# Altium PCB CANFD_SIC_transciever_with_WAKE_and_SLEEP.PcbDoc
Units mil, origin at the board's own origin, x right, y up, seen from the top; angles counter-clockwise.
Board outline 6000 x 4000 mil, 2 copper layers (Top Layer, Bottom Layer); 22 components, 19 nets, 62 pads, 0 vias.
Unrouted connection lines stored in the file: 35.
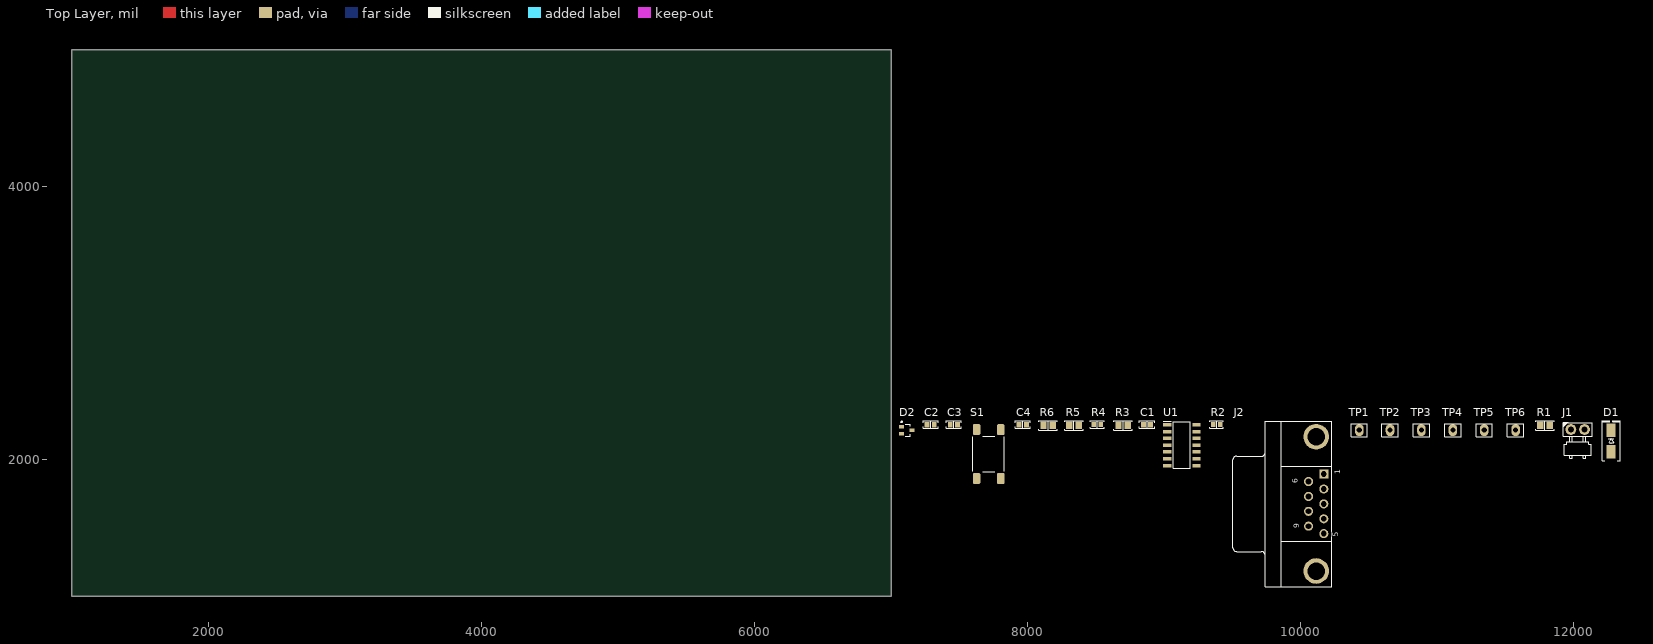
[diagram p0: Top Layer view]
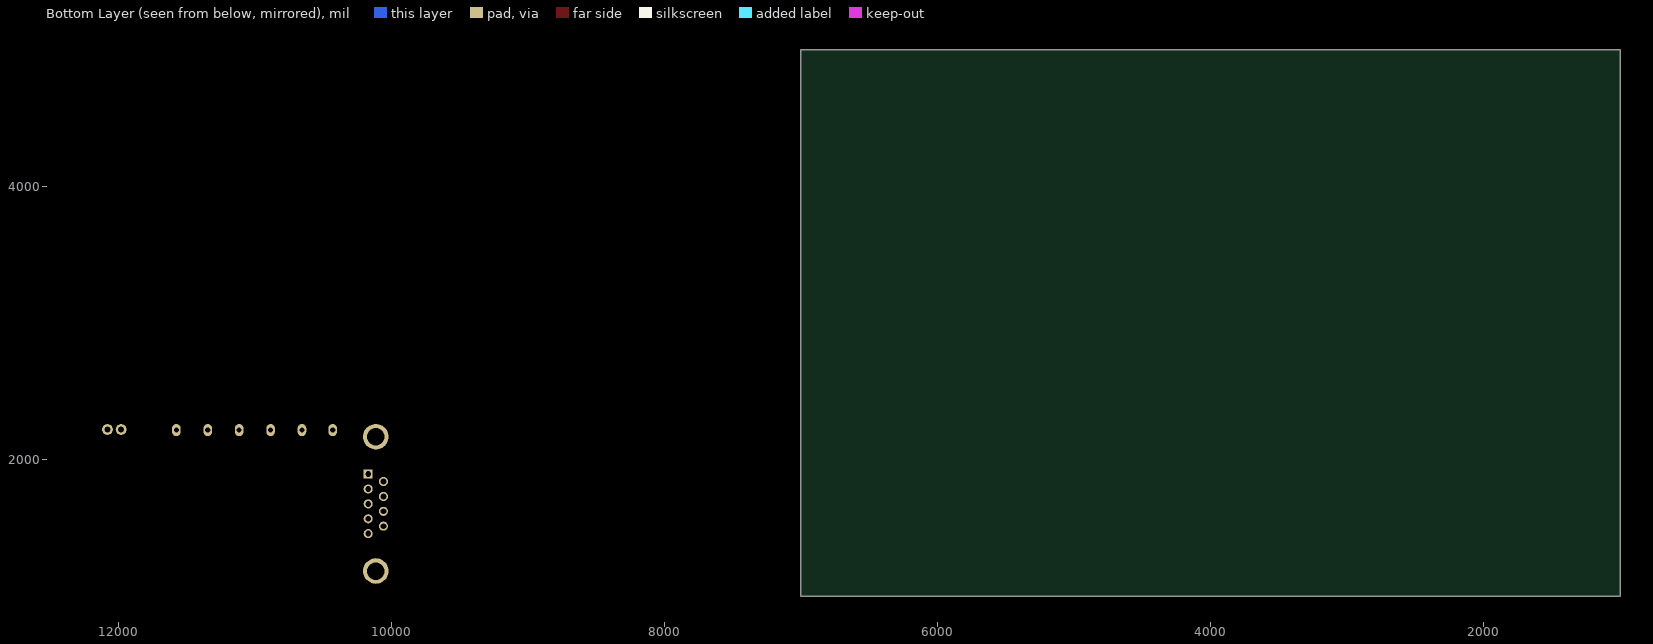
[diagram p1: Bottom Layer view, seen from below]

## Layer stack, top to bottom
Top Solder: solder mask 0.4, Solder Resist, Dk 3.5
Top Layer: signal copper 1.4
Dielectric 1: dielectric 12.6, FR-4, Dk 4.8
Bottom Layer: signal copper 1.4
Bottom Solder: solder mask 0.4, Solder Resist, Dk 3.5

## Board outline
1000,1000 7000,1000 7000,5000 1000,5000

## Design rules (kind name [scope] priority, off if disabled: settings)
Clearance [All] p1: gap=10 ignorepadtopadclearanceinfootprint=FALSE except(0: Arc-Hole Track-Hole SMDPad-Hole THPad-Hole Via-Hole Fill-Hole Poly-Hole Region-Hole Text-Hole)
PolygonConnect [All] p1: connectstyle=Relief reliefconductorwidth=10 reliefentries=4 polygonreliefangle="90 Angle" airgapwidth=10
RoomDefinition CANFD_SIC_transciever_with_WAKE_and_SLEEP [InComponentClass('CANFD_SIC_transciever_with_WAKE_and_SLEEP')] p1: confinementstyle=ConfineIn formatcopy=TRUE lockcomponents=FALSE outline 7045,1055 12350,1055 12350,2395 7045,2395
RoutingVias [All] p1: holewidth=28 width=50 viastyle="Through Hole" minholewidth=28 minwidth=50 maxholewidth=28 maxwidth=50
SolderMaskExpansion [All] p1: expansion=4 istentingtop=FALSE
Width [All] p1: maxlimit=10 minlimit=10 preferedwidth=10
30 further rules are at their usual default settings.

## Components (designator, comment, footprint, x,y, rotation, side; value= is the part's Value field where it differs from the comment)
C1 "100 pF" "CAP 0603_1608" 8875,2255 r0 top
C2 "0.1 µF" "CAP 0603_1608" 7290,2255 r0 top
C3 "0.1 µF" "CAP 0603_1608" 7460,2255 r0 top
C4 "0.1 µF" "CAP 0603_1608" 7965,2255 r0 top
D1 "VSSA210HM3_A/H" "DO214AC SMA" 12275,2135 r90 top
D2 "BZX84W-C5V1F" "DIODES SOT-323-3" 7115,2215 r0 top
J1 "M20-9960245" "HARWIN M20-9960245" 12030,2220 r0 top
J2 "DSUB 9 R M" DSUB9_R_M 10170,1675 r0 top
R1 "42.2 kOhms" "RES 0805_2012" 11790,2250 r0 top
R2 "60.4 Ohms" "RES 0603_1608" 9385,2255 r0 top
R3 "100 Ohms" "RES 0805_2012" 8700,2250 r0 top
R4 "60.4 Ohms" "RES 0603_1608" 8510,2255 r0 top
R5 "10 kOhms" "RES 0805_2012" 8340,2250 r0 top
R6 "10 kOhms" "RES 0805_2012" 8150,2250 r0 top
S1 "FSM4JSMA" "TE FSM4JSMA" 7715,2040 r0 top
TP1 "SSW-101-03-T-S" "SAMTEC SSW-101-03-T-S" 10430,2215 r0 top
TP2 "SSW-101-03-T-S" "SAMTEC SSW-101-03-T-S" 10655,2215 r0 top
TP3 "SSW-101-03-T-S" "SAMTEC SSW-101-03-T-S" 10885,2215 r0 top
TP4 "SSW-101-03-T-S" "SAMTEC SSW-101-03-T-S" 11115,2215 r0 top
TP5 "SSW-101-03-T-S" "SAMTEC SSW-101-03-T-S" 11345,2215 r0 top
TP6 "SSW-101-03-T-S" "SAMTEC SSW-101-03-T-S" 11575,2215 r0 top
U1 "TJA1463AT/0Z" SOIC127P600X175-14N 9130,2105 r0 top

## Footprints (in the part's own frame and the unit in brackets; to place one, negate y for a bottom-side part, rotate by r counter-clockwise, add the part's x,y. Pads: shape width x height; smd on the part's side, far side on the other; paste and mask are expansions set on the pad)
"CAP 0603_1608" [mm] "Chip Capacitor, 2-Leads, Body 1.60x0.80mm, IPC Medium Density"
  rect 0.9x1 smd: 1(-0.675,0) 2(0.675,0)
  silkscreen extent -1.4,-0.7 1.4,0.7, body extent -0.8,-0.41 0.8,0.41, height 0.82
"DIODES SOT-323-3" [mm] "SOT323, 3-Leads, Body 2.00x2.10mm, Pitch 0.65mm, IPC Medium Density"
  rect 0.9x0.7 smd: 1(-0.95,0.65) 2(0.95,0) 3(-0.95,-0.65)
  silkscreen extent -1.07,-1.1 0.67,1.67, body extent -1.06,-1 1.06,1, height 1
"DO214AC SMA" [mm] "Molded Diode, 2-Leads, Body 4.30x2.60mm, IPC Medium Density"
  rect 2.5x1.7 smd: 1(-2,0) 2(2,0)
  silkscreen extent -3.68,-1.65 3.75,1.65, body extent -2.6,-1.37 2.6,1.37, height 2.4
DSUB9_R_M [mm]
  rect 1.69x1.69 hole 1.09: 1(0,5.54)
  round 1.69 hole 1.09: 2(0,2.77) 3(0,0) 4(0,-2.77) 5(0,-5.54) 6(-2.84,4.155) 7(-2.84,1.385) 8(-2.84,-1.385) 9(-2.84,-4.155)
  round 4.76 hole 3.26: 10(-1.42,-12.495) 11(-1.42,12.495)
  silkscreen extent -16.92,-15.4 1.48,15.4, body extent -17.02,-15.4 1.58,15.4, height 12.77
"HARWIN M20-9960245" [mm] "2.54mm DIL PC TAIL PIN HEADER ASSEMBLY"
  round 2 hole 1.1: 1(-1.27,0) 2(1.27,0)
  silkscreen extent -2.7,-5.33 2.7,1.3, body extent -2.54,-10.9 2.54,0.32, height 2.54
"RES 0603_1608" [mm] "Chip Resistor, 2-Leads, Body 1.60x0.80mm, IPC Medium Density"
  rect 0.85x0.95 smd: 1(-0.65,0) 2(0.65,0)
  silkscreen extent -1.27,-0.7 1.27,0.7, body extent -0.8,-0.4 0.8,0.4, height 0.45
"RES 0805_2012" [mm] "Chip Resistor, 2-Leads, Body 2.00x1.25mm, IPC Medium Density"
  rect 1.15x1.35 smd: 1(-0.875,0) 2(0.875,0)
  silkscreen extent -1.7,-0.9 1.7,0.9, body extent -1,-0.62 1,0.63, height 0.6
"SAMTEC SSW-101-03-T-S" [mm]
  oval 1.6x2.25 hole 0.95: 1(0,0)
  silkscreen extent -1.52,-1.21 1.52,1.21, body extent -1.52,-1.21 1.52,1.21, height 8.51
SOIC127P600X175-14N [mm]
  rect 1.525x0.65 smd: 1(-2.712,3.81) 2(-2.712,2.54) 3(-2.712,1.27) 4(-2.712,0) 5(-2.712,-1.27) 6(-2.712,-2.54) 7(-2.712,-3.81) 8(2.712,-3.81) 9(2.712,-2.54) 10(2.712,-1.27) 11(2.712,0) 12(2.712,1.27) 13(2.712,2.54) 14(2.712,3.81)
  silkscreen extent -3.47,-4.33 1.6,4.48, body extent -2.95,-4.38 3.05,4.27, height 1.75
"TE FSM4JSMA" [mm]
  rrect50% 1.4x2.1 smd: 1(2.25,4.55) 2(2.25,-4.55) 3(-2.25,4.55) 4(-2.25,-4.55)
  silkscreen extent -2.92,-3.3 2.92,3.3, body extent -3,-5 3,5, height 5.08

## Part data
C1: library part CC0603JRNPO0BN101, "CAP CER 100PF 100V C0G/NPO 0603", Device Package="0603 (1608 Metric)", Manufacturer=Yageo, Operating Temperature="-55°C ~ 125°C", Supplier Part Number 1=311-1745-1-ND, Temperature Coefficient="C0G, NP0", Tolerance=±5%, Voltage - Rated=100V, Applications="General Purpose", Capacitance="100 pF", ComponentLink1Description=Datasheet, ComponentLink1URL=http://www.yageo.com/documents/recent/UPY-NP0X7R_MV_100-to-630V_21.pdf, ComponentLink2Description="DigiKey Link", ComponentLink2URL=https://www.digikey.com/en/products/detail/yageo/CC0603JRNPO0BN101/5195154, LastUpdated="9/19/2022 1:01:16 PM", Lifecycle Status=Active, Minimum Order=1, Mounting Type="Surface Mount, MLCC", Package / Case="0603 (1608 Metric)", Packaging=TapeAndReel, Part Number=CC0603JRNPO0BN101, Part Status=Active, PartId=3543, Price=0.01, Series=CC, Size / Dimension="0.063\" L x 0.031\" W (1.60mm x 0.80mm)", Supplier 1=DigiKey, Thickness (Max)="0.035\" (0.90mm)"
C2 C3 C4: library part CS0603KRX7R7BB104, "CAP CER 0.1UF 16V X7R 0603", Device Package="0603 (1608 Metric)", Manufacturer=Yageo, Operating Temperature="-55°C ~ 125°C", Supplier Part Number 1=311-3560-1-ND, Temperature Coefficient=X7R, Tolerance=±10%, Voltage - Rated=16V, Applications="Boardflex Sensitive", Capacitance="0.1 µF", ComponentLink1Description=Datasheet, ComponentLink1URL=http://www.yageo.com/NewPortal/yageodocoutput?fileName=/pdf/MLCC/UPY-ST_NPOX7R_16V-to-3KV_5.pdf, ComponentLink2Description="DigiKey Link", ComponentLink2URL=https://www.digikey.com/en/products/detail/yageo/CS0603KRX7R7BB104/6097897, Features="Soft Termination", LastUpdated="9/19/2022 1:01:20 PM", Lifecycle Status=Active, Minimum Order=1, Mounting Type="Surface Mount, MLCC", Package / Case="0603 (1608 Metric)", Packaging=TapeAndReel, Part Number=CS0603KRX7R7BB104, Part Status=Active, PartId=2286, Price=0.02, Series=CS, Size / Dimension="0.063\" L x 0.031\" W (1.60mm x 0.80mm)", Supplier 1=DigiKey, Thickness (Max)="0.037\" (0.95mm)"
D1: "DIODE SCHOTTKY 100V 2A DO214AC", Capacitance @ Vr, F="175pF @ 4V, 1MHz", Current - Average Rectified (Io)="2A (DC)", Current - Reverse Leakage @ Vr="150µA @ 100V", Manufacturer="Vishay Semiconductor Diodes Division", Operating Temperature - Junction="-40°C ~ 150°C", Package / Case="DO-214AC, SMA", Supplier Device Package="DO-214AC (SMA)", Supplier Part Number 1=VSSA210HM3_A/HGICT-ND, Voltage - DC Reverse (Vr) (Max)=100V, Voltage - Forward (Vf) (Max) @ If="700mV @ 2A", ComponentLink1Description=Datasheet, ComponentLink1URL=http://www.vishay.com/docs/89404/vssa210-m3.pdf, ComponentLink2Description="DigiKey Link", ComponentLink2URL=http://digikey.com/product-detail/en/vishay-semiconductor-diodes-division/VSSA210HM3_A-H/VSSA210HM3_A-HGICT-ND/7717343, Diode Type=Schottky, LastUpdated="9/19/2022 1:46:13 PM", Lifecycle Status=Active, Minimum Order=1, Mounting Type="Surface Mount", Packaging=TapeAndReel, Part Number=VSSA210HM3_A/H, Part Status=Active, PartId=1977, Price=0.12, Series="Automotive, AEC-Q101, TMBS®", Speed="Fast Recovery =< 500ns, > 200mA (Io)", Supplier 1=DigiKey
D2: "DIODE ZENER 5.1V 275MW SOT323", Current - Reverse Leakage @ Vr="2 µA @ 2 V", Manufacturer="Nexperia USA Inc.", Operating Temperature="150°C (TJ)", Package / Case="SC-70, SOT-323", Power - Max="275 mW", Supplier Device Package=SOT-323, Supplier Part Number 1=1727-8313-1-ND, Tolerance=±5%, Voltage - Forward (Vf) (Max) @ If="900 mV @ 10 mA", Voltage - Zener (Nom) (Vz)="5.1 V", ComponentLink1Description=Datasheet, ComponentLink1URL=https://assets.nexperia.com/documents/data-sheet/BZX84W_SER.pdf, ComponentLink2Description="DigiKey Link", ComponentLink2URL=https://www.digikey.com/en/products/detail/nexperia-usa-inc/BZX84W-C5V1F/9380728, Impedance (Max) (Zzt)="60 Ohms", LastUpdated="9/19/2022 1:51:23 PM", Lifecycle Status=Active, Minimum Order=1, Mounting Type="Surface Mount", Packaging=TapeAndReel, Part Number=BZX84W-C5V1F, Part Status=Active, PartId=909, Price=0.02, Series="Automotive, AEC-Q101", Supplier 1=DigiKey
J1: "CONN HEADER R/A 2POS 2.54MM", Current Rating (Amps)="3A per Contact", Insulation Color=Black, Manufacturer="Harwin Inc.", Material Flammability Rating="UL94 V-0", Operating Temperature="-40°C ~ 105°C", Supplier Part Number 1=952-2244-ND, ComponentLink1Description=Datasheet, ComponentLink1URL=https://cdn.harwin.com/pdfs/Harwin_PC_Connectors_M20.pdf, ComponentLink2Description="DigiKey Link", ComponentLink2URL=https://www.digikey.com/en/products/detail/harwin-inc/M20-9960245/3728208, Connector Type="Header, Cuttable", Contact Finish - Mating=Gold, Contact Length - Mating="0.240\" (6.10mm)", Contact Length - Post="0.118\" (3.00mm)", Contact Material=Brass, Contact Shape=Square, Contact Type="Male Pin", Fastening Type=Push-Pull, Insulation Height="0.100\" (2.54mm)", Insulation Material="Polyamide (PA6T), Nylon 6T", LastUpdated="9/21/2022 7:22:55 PM", Lifecycle Status=Active, Minimum Order=1, Mounting Type="Through Hole, Right Angle", Number of Positions=2, Number of Positions Loaded=All, Number of Rows=1, Packaging=Bulk, Part Number=M20-9960245, Part Status=Active, PartId=165, Pitch - Mating="0.100\" (2.54mm)", Price=0.07, Row Spacing - Mating="-40°C ~ 105°C", Series=M20, Shrouding=Unshrouded, Style="Board to Board or Cable", Supplier 1=DigiKey, Termination=Solder
J2: library part D09P33E6RX12LF, "D-Sub Standard Connectors 9P PIN RA US STAND UNC 4-40 INSERT", Current rating=5A, Manufacturer 1="Amphenol FCI", Package=DSUB9_R_M, Supplier Part Number 1=649-D09P33E6RX12LF, Temperature range=-55..125V, Voltage rating=300V, ComponentLink1Description=ProductPage, ComponentLink1URL=https://www.amphenol-cs.com/d-subminiature-delta-d-d09p33e6rx12lf.html, Life Cycle State=Active, Manufacturer Part Number 1=D09P33E6RX12LF, Part Number=D09P33E6RX12LF, Pin count=9, Supplier 1=Mouser
R1: library part CRCW080542K2FKECC, "RES 42.2K OHM 1% 1/8W 0805", Device Package="0805 (2012 Metric)", Manufacturer="Vishay Dale", Operating Temperature="-55°C ~ 155°C", Power (Watts)="0.125W, 1/8W", Supplier Device Package=0805, Supplier Part Number 1=541-4130-1-ND, Temperature Coefficient=±100ppm/°C, Tolerance=±1%, ComponentLink1Description=Datasheet, ComponentLink1URL=http://www.vishay.com/docs/28773/crcwce3.pdf, ComponentLink2Description="DigiKey Link", ComponentLink2URL=https://www.digikey.com/en/products/detail/vishay-dale/CRCW080542K2FKECC/7928552, Composition="Thick Film", Height - Seated (Max)="0.024\" (0.60mm)", LastUpdated="9/19/2022 1:36:51 PM", Lifecycle Status=Active, Minimum Order=1, Number of Terminations=2, Package / Case="0805 (2012 Metric)", Packaging=TapeAndReel, Part Number=CRCW080542K2FKECC, Part Status=Active, PartId=30007, Price=0.01, Resistance="42.2 kOhms", Series=CRCW-C, Size / Dimension="0.079\" L x 0.049\" W (2.00mm x 1.25mm)", Supplier 1=DigiKey
R2 R4: library part RK73H1JTTD60R4F, "RES 60.4 OHM 1% 1/8W 0603", Device Package="0603 (1608 Metric)", Manufacturer="KOA Speer Electronics, Inc.", Operating Temperature="-55°C ~ 155°C", Power (Watts)="0.125W, 1/8W", Ratings=AEC-Q200, Supplier Device Package=0603, Supplier Part Number 1=2019-RK73H1JTTD60R4FCT-ND, Temperature Coefficient=±100ppm/°C, Tolerance=±1%, ComponentLink1Description=Datasheet, ComponentLink1URL=http://www.koaspeer.com/catimages/Products/RK73H/RK73H.pdf, ComponentLink2Description="DigiKey Link", ComponentLink2URL=https://www.digikey.com/en/products/detail/koa-speer-electronics-inc/RK73H1JTTD60R4F/9845016, Composition="Thick Film", Features="Automotive AEC-Q200, Moisture Resistant", Height - Seated (Max)="0.022\" (0.55mm)", LastUpdated="9/19/2022 1:22:33 PM", Lifecycle Status=Active, Minimum Order=1, Number of Terminations=2, Package / Case="0603 (1608 Metric)", Packaging=CutTape, Part Number=RK73H1JTTD60R4F, Part Status=Active, PartId=5191, Price=0.01, Resistance="60.4 Ohms", Series=RK73H, Size / Dimension="0.063\" L x 0.031\" W (1.60mm x 0.80mm)", Supplier 1=DigiKey
R3: library part ERJ-6ENF1000V, "RES SMD 100 OHM 1% 1/8W 0805", Device Package="0805 (2012 Metric)", Manufacturer="Panasonic Electronic Components", Operating Temperature="-55°C ~ 155°C", Power (Watts)="0.125W, 1/8W", Ratings=AEC-Q200, Supplier Device Package=0805, Supplier Part Number 1=P100CCT-ND, Temperature Coefficient=±100ppm/°C, Tolerance=±1%, ComponentLink1Description=Datasheet, ComponentLink1URL=https://industrial.panasonic.com/cdbs/www-data/pdf/RDA0000/AOA0000C304.pdf, ComponentLink2Description="DigiKey Link", ComponentLink2URL=https://www.digikey.com/en/products/detail/panasonic-electronic-components/ERJ-6ENF1000V/111089, Composition="Thick Film", Features="Automotive AEC-Q200", Height - Seated (Max)="0.028\" (0.70mm)", LastUpdated="9/19/2022 1:36:43 PM", Lifecycle Status=Active, Minimum Order=1, Number of Terminations=2, Package / Case="0805 (2012 Metric)", Packaging=TapeAndReel, Part Number=ERJ-6ENF1000V, Part Status=Active, PartId=32261, Price=0.01, Resistance="100 Ohms", Series=ERJ-6EN, Size / Dimension="0.079\" L x 0.049\" W (2.00mm x 1.25mm)", Supplier 1=DigiKey
R5 R6: library part RT0805FRE0710KL, "RES SMD 10K OHM 1% 1/8W 0805", Device Package="0805 (2012 Metric)", Manufacturer=Yageo, Operating Temperature="-55°C ~ 155°C", Power (Watts)="0.125W, 1/8W", Supplier Device Package=0805, Supplier Part Number 1=YAG1239CT-ND, Temperature Coefficient=±50ppm/°C, Tolerance=±1%, ComponentLink1Description=Datasheet, ComponentLink1URL=https://www.yageo.com/upload/media/product/productsearch/datasheet/rchip/PYu-RT_1-to-0.01_RoHS_L_11.pdf, ComponentLink2Description="DigiKey Link", ComponentLink2URL=https://www.digikey.com/en/products/detail/yageo/RT0805FRE0710KL/1078908, Composition="Thin Film", Height - Seated (Max)="0.024\" (0.60mm)", LastUpdated="9/19/2022 1:36:42 PM", Lifecycle Status=Active, Minimum Order=1, Number of Terminations=2, Package / Case="0805 (2012 Metric)", Packaging=TapeAndReel, Part Number=RT0805FRE0710KL, Part Status=Active, PartId=32332, Price=0.01, Resistance="10 kOhms", Series=RT, Size / Dimension="0.079\" L x 0.049\" W (2.00mm x 1.25mm)", Supplier 1=DigiKey
S1: "SWITCH TACTILE SPST-NO 0.05A 24V", Contact Rating @ Voltage="0.05A @ 24VDC", Manufacturer="TE Connectivity ALCOSWITCH Switches", Operating Force=160gf, Operating Temperature="-35°C ~ 85°C", Supplier Part Number 1=450-1129-ND, Actuator Height off PCB, Vertical=5.00mm, Actuator Orientation="Top Actuated", Actuator Type=Standard, Circuit=SPST-NO, ComponentLink1Description=Datasheet, ComponentLink1URL=https://www.te.com/commerce/DocumentDelivery/DDEController?Action=srchrtrv&DocNm=1308111-1_SWITCHES_CORE_PROGRAM_CATALOG&DocType=CS&DocLang=English, ComponentLink2Description="DigiKey Link", ComponentLink2URL=https://www.digikey.com/en/products/detail/te-connectivity-alcoswitch-switches/FSM4JSMA/525821, Illumination=Non-Illuminated, LastUpdated="9/19/2022 2:02:57 PM", Lifecycle Status=Active, Minimum Order=1, Mounting Type="Surface Mount", Outline="6.00mm x 6.00mm", Packaging=Bulk, Part Number=FSM4JSMA, Part Status=Active, Price=0.14, Series=FSMJSMA, Supplier 1=DigiKey, Switch Function=Off-Mom, Termination Style="Gull Wing"
TP1 TP2 TP3 TP4 TP5 TP6: "CONN RCPT 1POS TIN PCB", Current Rating (Amps)="5.7A per Contact", Insulation Color=Black, Manufacturer="Samtec Inc.", Material Flammability Rating="UL94 V-0", Operating Temperature="-55°C ~ 105°C", Supplier Part Number 1=SSW-101-03-T-S-ND, ComponentLink2Description="DigiKey Link", ComponentLink2URL=http://digikey.com/product-detail/en/samtec-inc/SSW-101-03-T-S/SSW-101-03-T-S-ND/7872591, Connector Type=Receptacle, Contact Finish - Mating=Tin, Contact Finish - Post=Tin, Contact Type=Forked, Fastening Type=Push-Pull, LastUpdated="6/21/2022 3:04:54 PM", Lifecycle Status=Active, Minimum Order=1, Mounting Type="Through Hole", Number of Positions=1, Number of Positions Loaded=All, Number of Rows=1, Packaging=Bulk, Part Number=SSW-101-03-T-S, Part Status=Active, Price=0.59, Series=SSW, Style="Board to Board or Cable", Supplier 1=DigiKey, Termination=Solder
U1: "CAN SIC transciever", Manufacturer 1=NXP, Mouser Part Number=771-TJA1463AT/0Z, Package="SOIC 14", Temperature range=-40..150C, ComponentLink1Description=Datasheet, ComponentLink1URL=https://www.nxp.com/docs/en/data-sheet/TJA1463.pdf, Datasheet Link=https://www.arrow.com/en/products/tja1463at0z/nxp-semiconductors?region=nac, Geometry.Height=1.75mm, Life Cycle State=Active, Manufacturer Part Number 1=TJA1463AT/0Z, Manufacturer_Name=NXP, Manufacturer_Part_Number=TJA1463AT/0Z, Mouser Price/Stock=https://www.mouser.co.uk/ProductDetail/NXP-Semiconductors/TJA1463AT-0Z?qs=eP2BKZSCXI71yVMPsVk58A%3D%3D, Part Number=TJA1463AT/0Z, Supplier 1=Mouser, Supplier Part Number 1=771-TJA1463AT/0Z

## Nets (pads, with @x,y where several pads share a name; then routed paths per layer and width w, separated by ;. In a path a pad name is that pad's centre, name@x,y a point inside that pad or via, vN(x,y) a via of type N, cw(c..) or ccw(c..) an arc to the next point about the centre after c; other vN are vias at no path point)
3V3: C2.2 U1.5
+5: C3.2 U1.3
CAN_EN: TP2.1 U1.6
CAN_ERR_N: TP5.1 U1.8
CAN_INH: TP1.1 U1.7
CAN_STB_N: TP6.1 U1.14
CAN_TX: TP4.1 U1.1
CANH: J1.2 J2.7 U1.13
CANL: J2.2 R4.1 U1.12
GND: C1.2 C2.1 C3.1 C4.1 D2.1 J2.3 J2.10 J2.11 S1.1 S1.2 U1.2
NetC1_1: C1.1 R2.1 R4.2
NetD1_2: D1.2 R1.2
NetJ1_1: J1.1 R2.2
NetR3_1: R3.1 TP3.1
NetR3_2: R3.2 U1.4
NetR5_1: R5.1 R6.1 S1.3 S1.4
NetR5_2: R5.2 U1.9
PWR_IN: D1.1
VBAT: C4.2 D2.2 R1.1 R6.2 U1.10
pads on no net: D2.3 J2.1 J2.4 J2.5 J2.6 J2.8 J2.9 U1.11

## Text inside footprints (layer, text, board x,y; h text height)
J2: Top Overlay "9" at 9990,1495 h39.37 r90; Top Overlay "6" at 9980,1825 h39.37 r90; Top Overlay "1" at 10290,1893.11 h39.37 r90; Top Overlay "5" at 10275.04,1434.06 h39.37 r90